# EAGLE board CT_schematic (EAGLE 7.6.0)

Size 100 x 80 mm. Coordinates in mm from the lower left corner, seen from the top.
Outline: 0,0 100,0 100,80 0,80 0,0
Copper layers (1*16): Top 0.035mm / dielectric 1.5mm / Bottom 0.035mm
Design rules "default": minimum track width 10mil, minimum drill 24mil, track to track 8mil, track to pad 8mil, pad to pad 8mil, via to via 8mil, smd to smd 8mil, copper to edge 40mil, drill to drill 8mil, minimum pad ring 10mil, minimum via ring 8mil, stop-mask expansion 4mil, vias tented up to drill 0mil, thermal gap 10mil

## Footprints (pad centres in the part's own frame; a part is rotated, then mirrored left to right if it is on the bottom)
C0603 = smd 0.8 x 0.8: 1 -0.762,0; 2 0.762,0
C0402 = smd 0.5 x 0.5: 1 -0.508,0; 2 0.508,0
C0805 = smd 1.2 x 1.3: 1 -1.016,0; 2 1.016,0
C1206 = smd 1.3 x 1.6: 1 -1.524,0; 2 1.524,0
L0603 = smd 0.8 x 0.8: 1 -0.762,0; 2 0.762,0
WE-HCI_7030/7040/7050 = smd 2.5 x 3: 1 -2.45,0; 2 2.45,0
R0603 = smd 0.8 x 0.8: 1 -0.762,0; 2 0.762,0
LQFP48 = smd 0.3 x 1.2: 1 -2.75,-4.25; 2 -2.25,-4.25; 3 -1.75,-4.25; 4 -1.25,-4.25; 5 -0.75,-4.25; 6 -0.25,-4.25; 7 0.25,-4.25; 8 0.75,-4.25; 9 1.25,-4.25; 10 1.75,-4.25; 11 2.25,-4.25; 12 2.75,-4.25; 25 2.75,4.25; 26 2.25,4.25; 27 1.75,4.25; 28 1.25,4.25; 29 0.75,4.25; 30 0.25,4.25; 31 -0.25,4.25; 32 -0.75,4.25; 33 -1.25,4.25; 34 -1.75,4.25; 35 -2.25,4.25; 36 -2.75,4.25 | smd 1.2 x 0.3: 13 4.25,-2.75; 14 4.25,-2.25; 15 4.25,-1.75; 16 4.25,-1.25; 17 4.25,-0.75; 18 4.25,-0.25; 19 4.25,0.25; 20 4.25,0.75; 21 4.25,1.25; 22 4.25,1.75; 23 4.25,2.25; 24 4.25,2.75; 37 -4.25,2.75; 38 -4.25,2.25; 39 -4.25,1.75; 40 -4.25,1.25; 41 -4.25,0.75; 42 -4.25,0.25; 43 -4.25,-0.25; 44 -4.25,-0.75; 45 -4.25,-1.25; 46 -4.25,-1.75; 47 -4.25,-2.25; 48 -4.25,-2.75
SOIC-8 = smd 1.6 x 0.6: 1 -2.7,1.905 | smd 1.55 x 0.6: 2 -2.7,0.635; 3 -2.7,-0.635; 4 -2.7,-1.905; 5 2.7,-1.905; 6 2.7,-0.635; 7 2.7,0.635; 8 2.7,1.905
SOT-23-8 = smd 0.4 x 1.2: 1 -0.975,-1.3; 2 -0.325,-1.3; 3 0.325,-1.3; 4 0.975,-1.3; 5 0.975,1.3; 6 0.325,1.3; 7 -0.325,1.3; 8 -0.975,1.3
182-009-MALE = drill 1.194 pad 1.524 octagon: 1 -5.537,10.923; 2 -2.769,10.923; 3 0,10.923; 4 2.769,10.923; 5 5.537,10.923; 6 -4.153,8.08; 7 -1.384,8.08; 8 1.384,8.08; 9 4.153,8.08 | hole 3.048: -12.446,9.501; 12.446,9.501
FCI_10118193-0001LF = smd 0.4 x 1.35: 1 -1.3,2.675; 2 -0.65,2.675; 3 0,2.675; 4 0.65,2.675; 5 1.3,2.675 | smd 1.6 x 1.4: 6 -3.2,2.45; 7 3.2,2.45 | smd 1.9 x 1.9: 8 -1.2,0; 9 1.2,0 | hole 0.5: -3.3,0; 3.3,0
SOT143B = smd 1 x 0.7: 1 -0.75,-1 | smd 0.6 x 0.7: 2 0.95,-1; 3 0.95,1; 4 -0.95,1
ABS07-32.768KHZ-7-T = smd 1.1 x 2.4: 1 -2.5,0; 2 0,0
ABLS-25.000MHZ-B2F-T = smd 5.6 x 2.8: 1 -3.81,0; 2 5.69,0
TSOT-23-5 = smd 1.3 x 0.62: 1 -1.31,0.95; 2 -1.31,0; 3 -1.31,-0.95; 4 1.31,-0.95; 5 1.31,0.95
DFN8_2X3MC = smd 0.813 x 0.305: 1 -1.398,0.75; 2 -1.398,0.25; 3 -1.398,-0.25; 4 -1.398,-0.75; 5 1.398,-0.75; 6 1.398,-0.25; 7 1.398,0.25; 8 1.398,0.75 | smd 1.753 x 1.549: 9 0,0
JST-2-SMD = smd 1 x 4.6: 1 -1,-3.7; 2 1,-3.7 | smd 1.6 x 3.4: NC1 -3.4,1.5; NC2 3.4,1.5
SON-6 = smd 0.55 x 0.3: 1 -0.355,0.5 | smd 0.52 x 0.3: 2 -0.37,0; 3 -0.37,-0.5; 4 0.37,-0.5; 5 0.37,0; 6 0.37,0.5
SW_4-1437565-2 = smd 1.4 x 2.1: 1 -2.23,4.55; 2 -2.23,-4.55; 3 2.23,4.55; 4 2.23,-4.55
LGM67K-G1J2-24-Z = smd 0.8 x 1.4: A -2,0; C 0,0
NC7SZ125M5X = smd 1.3 x 0.7: 1 -1.3,0.95; 2 -1.3,0; 3 -1.3,-0.95; 4 1.3,-0.95; 5 1.3,0.95

## Placement (x,y rotation side)
C1  1e-06  [C0603]  -48.26,59.69 0 top  (outside the outline)
C2  1e-07  [C0603]  -52.07,59.69 0 top  (outside the outline)
C3  1e-07  [C0603]  -55.88,59.69 0 top  (outside the outline)
C4  1e-07  [C0603]  -59.69,59.69 0 top  (outside the outline)
C5  1e-07  [C0603]  -63.5,59.69 0 top  (outside the outline)
C6  4.7e-06  [C0603]  -44.45,59.69 0 top  (outside the outline)
C7  1e-08  [C0603]  -67.31,59.69 0 top  (outside the outline)
C8  1e-06  [C0603]  -15.24,64.77 0 top  (outside the outline)
C9  1e-11  [C0402]  -45.72,64.77 0 top  (outside the outline)
C10  1e-11  [C0402]  -49.53,64.77 0 top  (outside the outline)
C11  1e-11  [C0402]  -53.34,64.77 0 top  (outside the outline)
C12  1e-11  [C0402]  -57.15,64.77 0 top  (outside the outline)
C13  1e-08  [C0402]  -60.96,64.77 0 top  (outside the outline)
C14  1e-07  [C0402]  -64.77,64.77 0 top  (outside the outline)
C15  1e-05  [C0805]  -15.24,54.61 0 top  (outside the outline)
C16  1e-05  [C0805]  -20.32,54.61 0 top  (outside the outline)
C17  1e-07  [C0402]  -15.24,69.85 0 top  (outside the outline)
C18  1e-05  [C1206]  -48.26,46.99 0 top  (outside the outline)
C19  1e-05  [C1206]  -54.61,46.99 0 top  (outside the outline)
C20  1e-08  [C0402]  -19.05,69.85 0 top  (outside the outline)
F1  240.0  [L0603]  -19.05,64.77 0 top  (outside the outline)
I1  2e-06  [WE-HCI_7030/7040/7050]  -57.15,6.35 0 top  (outside the outline)
R1  10000.0  [R0603]  -58.42,54.61 0 top  (outside the outline)
R2  1000.0  [R0603]  -22.86,64.77 0 top  (outside the outline)
R3  1600.5  [R0603]  -26.67,64.77 0 top  (outside the outline)
R4  4700.0  [R0603]  -30.48,64.77 0 top  (outside the outline)
R5  10000.0  [R0603]  -63.5,54.61 0 top  (outside the outline)
R6  10000.0  [R0603]  -15.24,59.69 0 top  (outside the outline)
R7  10000.0  [R0603]  -20.32,59.69 0 top  (outside the outline)
R8  10000.0  [R0603]  -25.4,59.69 0 top  (outside the outline)
R9  120.0  [R0603]  -34.29,64.77 0 top  (outside the outline)
R10  100000.0  [R0603]  -38.1,54.61 0 top  (outside the outline)
R11  220000.0  [R0603]  -43.18,54.61 0 top  (outside the outline)
R12  1000000.0  [R0603]  -33.02,54.61 0 top  (outside the outline)
R13  10000.0  [R0603]  -30.48,59.69 0 top  (outside the outline)
R14  10000.0  [R0603]  -35.56,59.69 0 top  (outside the outline)
R15  9100.0  [R0603]  -38.1,64.77 0 top  (outside the outline)
R16  680000.0  [R0603]  -48.26,54.61 0 top  (outside the outline)
R17  120000.0  [R0603]  -53.34,54.61 0 top  (outside the outline)
R18  2000.0  [R0603]  -41.91,64.77 0 top  (outside the outline)
R19  10000.0  [R0603]  -40.64,59.69 0 top  (outside the outline)
U1  stm32f103c6t7  [LQFP48]  -57.15,27.94 0 top  (outside the outline)
U2  AT25320B-SSHL-T  [SOIC-8]  -24.13,39.37 0 top  (outside the outline)
U3  MAX3051EKA+T  [SOT-23-8]  -59.69,46.99 0 top  (outside the outline)
U4  182-009-113R531  [182-009-MALE]  -36.83,6.35 0 top  (outside the outline)
U5  10118193-0001LF  [FCI_10118193-0001LF]  -34.29,38.1 0 top  (outside the outline)
U6  prtr5v0u2ax  [SOT143B]  -31.75,69.85 0 top  (outside the outline)
U7  ABS07-32.768KHZ-7-T  [ABS07-32.768KHZ-7-T]  -27.94,48.26 0 top  (outside the outline)
U8  ABLS-25.000MHZ-B2F-T  [ABLS-25.000MHZ-B2F-T]  -53.34,38.1 0 top  (outside the outline)
U9  ltc3406es5  [TSOT-23-5]  -25.4,53.34 0 top  (outside the outline)
U10  MCP73831T-2ACI/MC  [DFN8_2X3MC]  -41.91,68.58 0 top  (outside the outline)
U11  S2B-PH-SM4-TB(LF)(SN)  [JST-2-SMD]  -41.91,29.21 0 top  (outside the outline)
U12  TPS3895ADRYR  [SON-6]  -35.56,68.58 0 top  (outside the outline)
U13  4-1437565-2  [SW_4-1437565-2]  -27.94,27.94 0 top  (outside the outline)
U14  Q65110A2395  [LGM67K-G1J2-24-Z]  -36.83,46.99 0 top  (outside the outline)
U15  nc7sz125m5x  [NC7SZ125M5X]  -64.77,45.72 0 top  (outside the outline)

## Library data of the parts
C1-C20 F1 I1 R1-R19 U1-U15 = circuit_tree

## Nets
CLK_CRYSTAL_U1_3: C9.1 U1.3 U7.1
CLK_CRYSTAL_U1_4: C10.1 U1.4 U7.2
CLK_CRYSTAL_U1_5: C11.1 U1.5 U8.1
CLK_CRYSTAL_U1_6: C12.1 U1.6 U8.2
GND: C1.2 C2.2 C3.2 C4.2 C5.2 C6.2 C7.2 C8.2 C9.2 C10.2 C11.2 C12.2 C13.2 C14.2 C15.2 C16.1 C16.2 C17.2 C18.2 C19.2 C20.2 R2.2 R5.2 R10.2 R11.2 R15.2 R17.2 R18.2 U1.8 U1.23 U1.35 U1.47 U2.4 U3.2 U4.5 U5.5 U5.6 U5.7 U5.8 U5.9 U6.1 U9.2 U10.6 U10.9 U11.2 U12.2 U14.C U15.1 U15.3
INPUT_USBPOWER_5V: C18.1 R19.2 U5.1 U6.4 U10.1 U10.2
NET_U1_7: R4.1 U1.7 U15.4
NET_U1_9: C7.1 C8.1 F1.1 U1.9
NET_U1_42: R3.1 U1.42 U14.A
NET_U1_43: R1.1 U1.43 U13.3 U13.4
NET_U1_44: R5.1 U1.44
NET_U2_3: R6.1 U2.3
NET_U2_7: R8.1 U2.7
NET_U3_6: R9.2 U3.6
NET_U3_8: R10.1 U3.8
NET_U4_2: R9.2 U3.6 U4.2
NET_U4_3: R9.1 U3.7 U4.3
NET_U9_1: U9.1
NET_U9_3: I1.1 U9.3
NET_U9_5: R11.1 R12.1 U9.5
NET_U9_ATNET_3: I1.2 R12.2
NET_U10_5: R19.1 U10.5
NET_U10_8: R18.1 U10.8
NET_U12_1: R14.1 R15.1 U12.1
NET_U12_3: R16.2 R17.1 U12.3
NET_U12_4: R13.1 U12.4 U15.2
NET_U13_1: R2.1 U13.1 U13.2
PROC_CAN_RX: U1.45 U3.4
PROC_CAN_TX: U1.46 U3.1
PROC_SPI1_MISO: U1.16 U2.2
PROC_SPI1_MOSI: U1.17 U2.5
PROC_SPI1_NSS: R7.1 U1.14 U2.1
PROC_SPI1_SCK: U1.15 U2.6
PROC_USB_DM: U1.32 U5.2 U6.3
PROC_USB_DP: U1.33 U5.3 U6.2
VCC_S1_3V7: C15.1 C19.1 U9.4 U10.3 U10.4 U11.1
VCC_TIER1_3V3: C1.1 C2.1 C3.1 C4.1 C5.1 C6.1 C13.1 C14.1 C16.2 C17.1 C20.1 F1.2 I1.2 R1.2 R3.2 R4.2 R6.2 R7.2 R8.2 R12.2 R13.2 R14.2 R16.1 U1.1 U1.24 U1.36 U1.48 U2.8 U3.3 U12.6 U15.5

## Tracks (layer width: path | path; a pad name or v marks a point on that pad's centre or on a via)
CLK_CRYSTAL_U1_3  (2 unrouted)
CLK_CRYSTAL_U1_4  (2 unrouted)
CLK_CRYSTAL_U1_5  (2 unrouted)
CLK_CRYSTAL_U1_6  (2 unrouted)
GND  (48 unrouted)
INPUT_USBPOWER_5V  (5 unrouted)
NET_U1_7  (2 unrouted)
NET_U1_9  (3 unrouted)
NET_U1_42  (2 unrouted)
NET_U1_43  (3 unrouted)
NET_U1_44  (1 unrouted)
NET_U2_3  (1 unrouted)
NET_U2_7  (1 unrouted)
NET_U3_6  (1 unrouted)
NET_U3_8  (1 unrouted)
NET_U4_2  (2 unrouted)
NET_U4_3  (2 unrouted)
NET_U9_3  (1 unrouted)
NET_U9_5  (2 unrouted)
NET_U9_ATNET_3  (1 unrouted)
NET_U10_5  (1 unrouted)
NET_U10_8  (1 unrouted)
NET_U12_1  (2 unrouted)
NET_U12_3  (2 unrouted)
NET_U12_4  (2 unrouted)
NET_U13_1  (2 unrouted)
PROC_CAN_RX  (1 unrouted)
PROC_CAN_TX  (1 unrouted)
PROC_SPI1_MISO  (1 unrouted)
PROC_SPI1_MOSI  (1 unrouted)
PROC_SPI1_NSS  (2 unrouted)
PROC_SPI1_SCK  (1 unrouted)
PROC_USB_DM  (2 unrouted)
PROC_USB_DP  (2 unrouted)
VCC_S1_3V7  (5 unrouted)
VCC_TIER1_3V3  (30 unrouted)